# Altium PCB GNSS_MB.PcbDoc
Units mm, origin at the board's own origin, x right, y up, seen from the top; angles counter-clockwise.
Board outline 55 x 55 mm, 4 copper layers (TOP, GND, POWER, BOTTOM), stack 1.586 mm thick; 45 components, 27 nets, 155 pads, 292 vias.
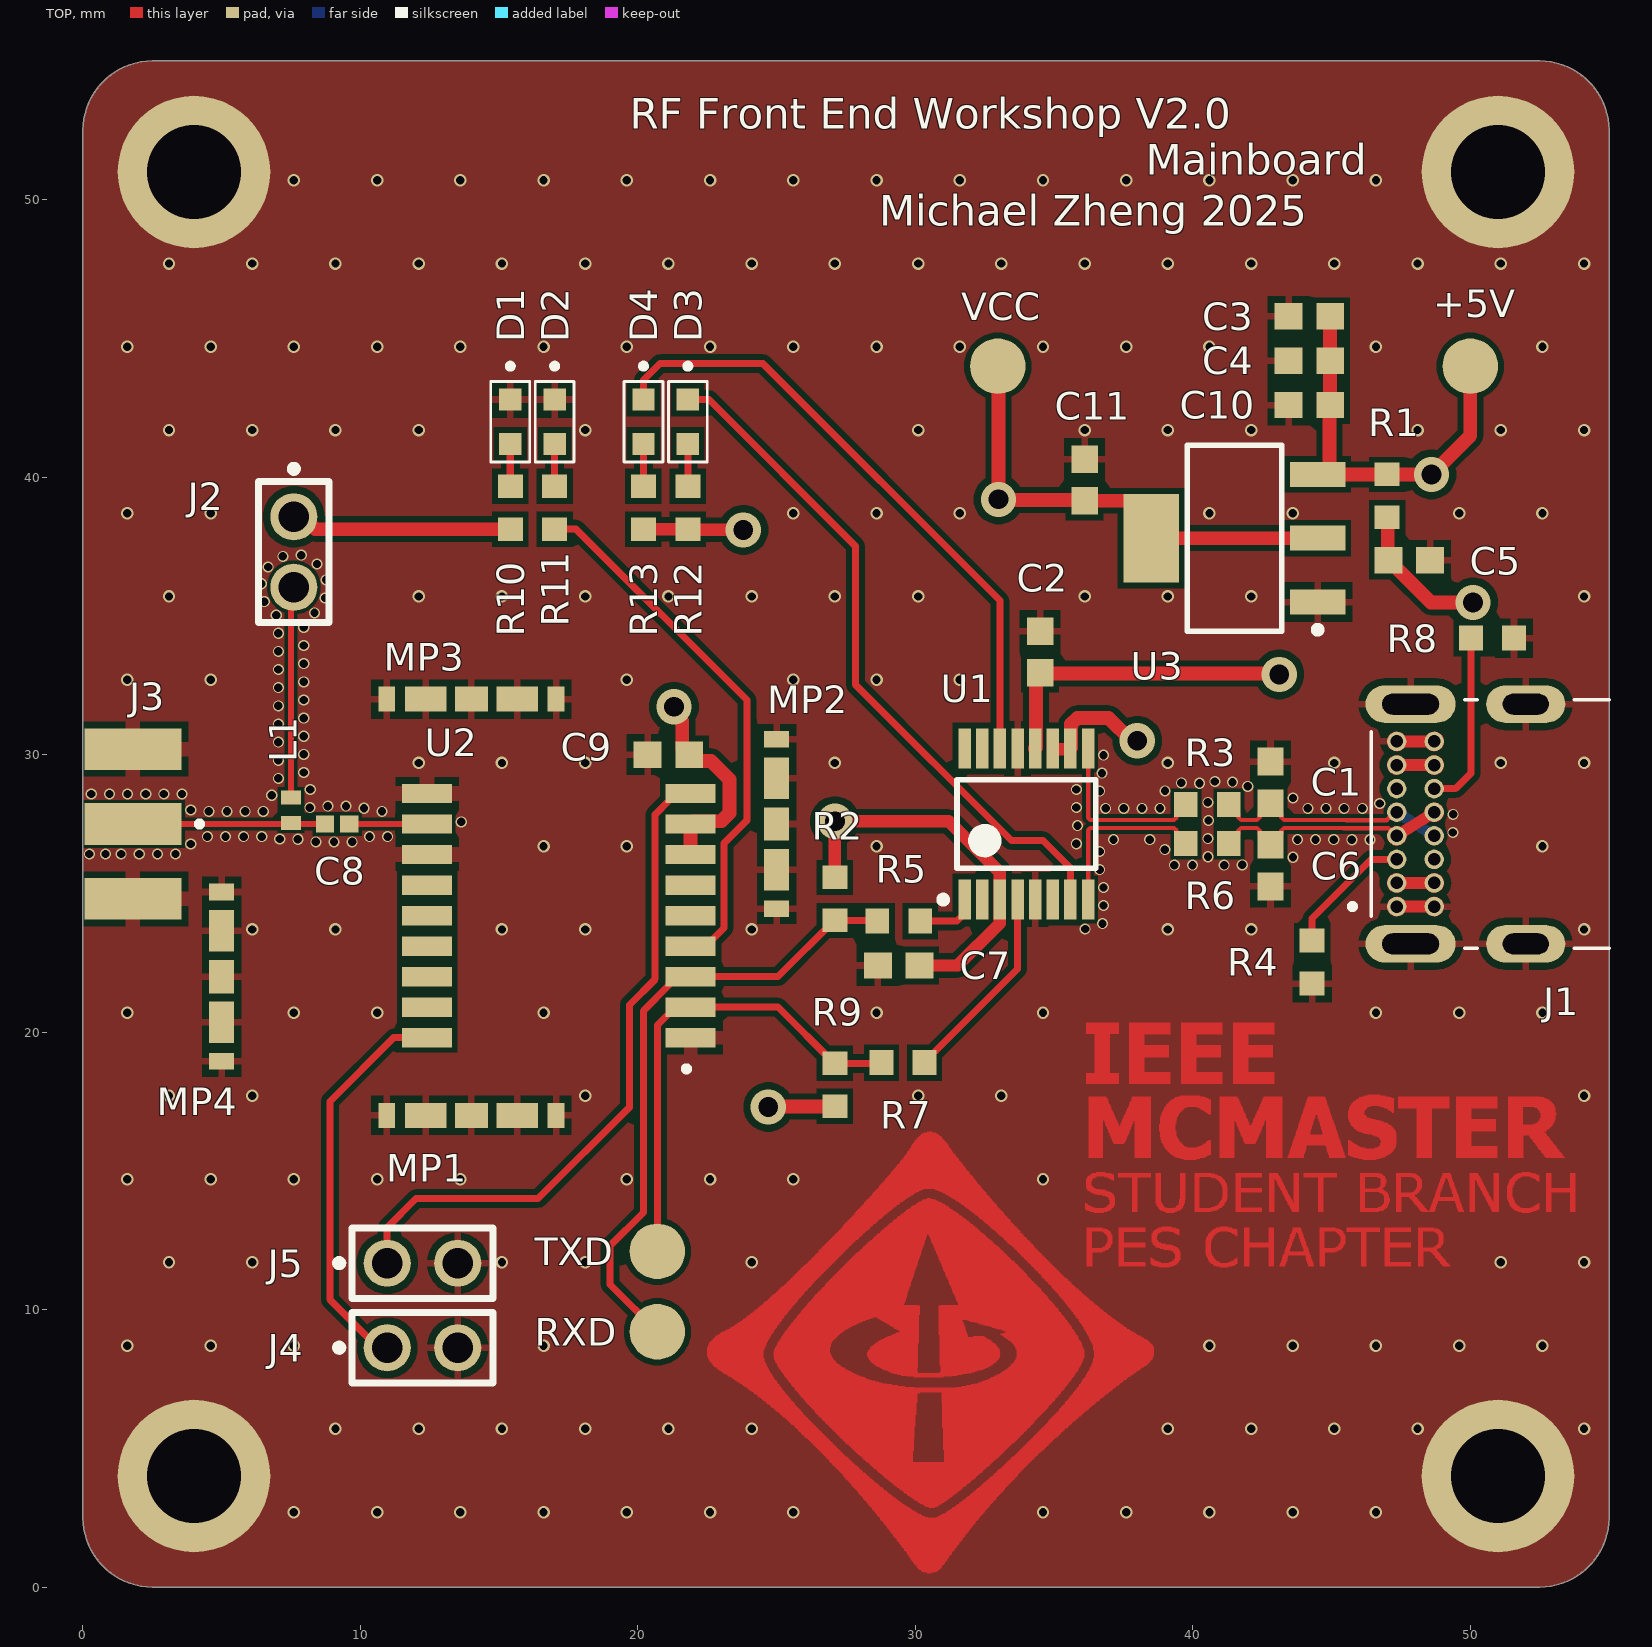
[diagram p0: TOP view]
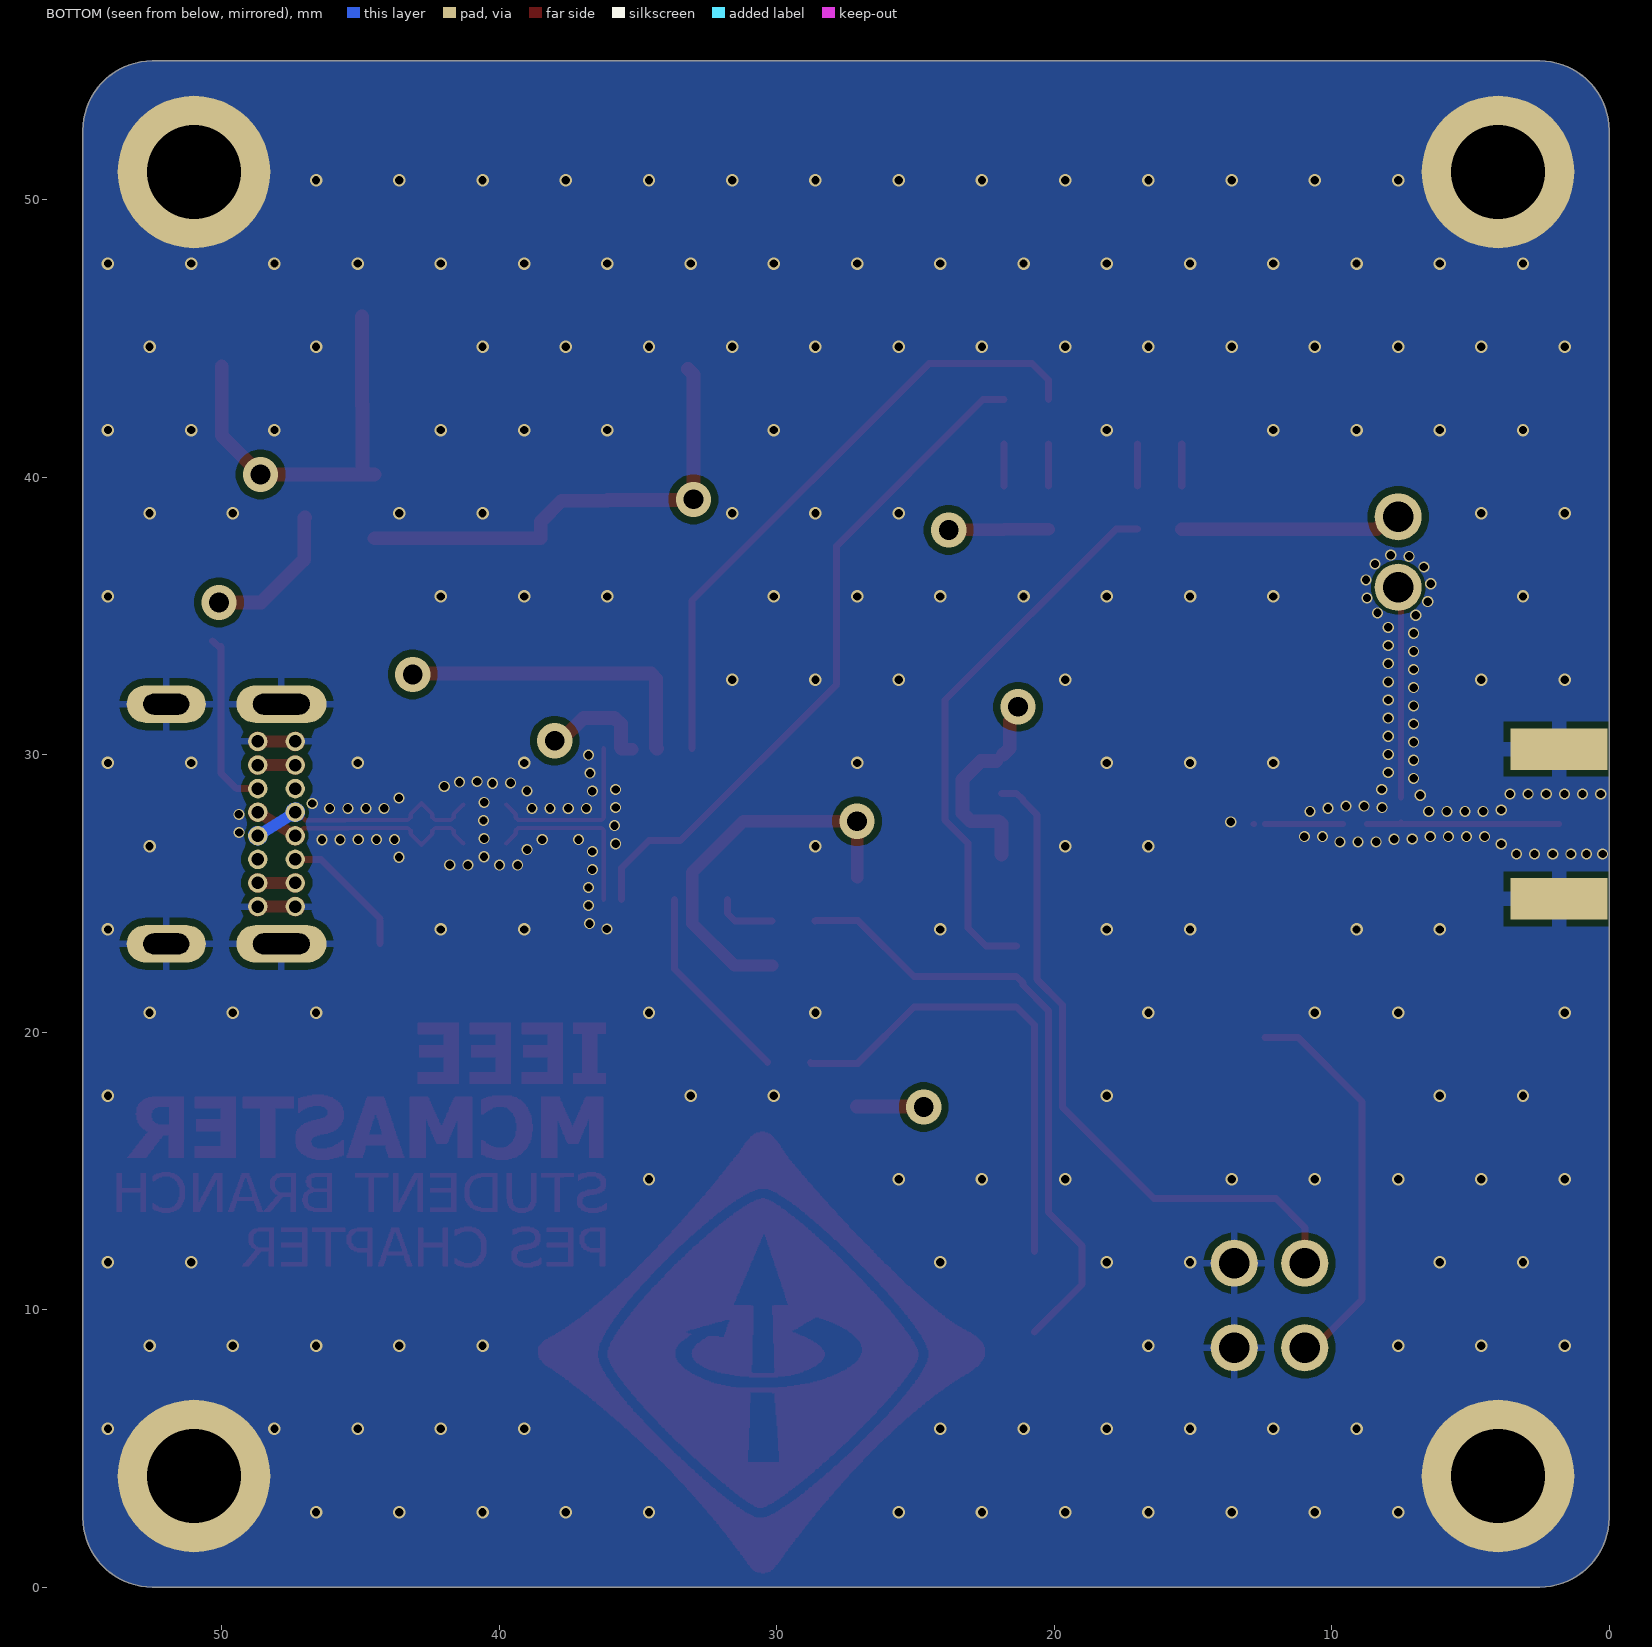
[diagram p1: BOTTOM view, seen from below]
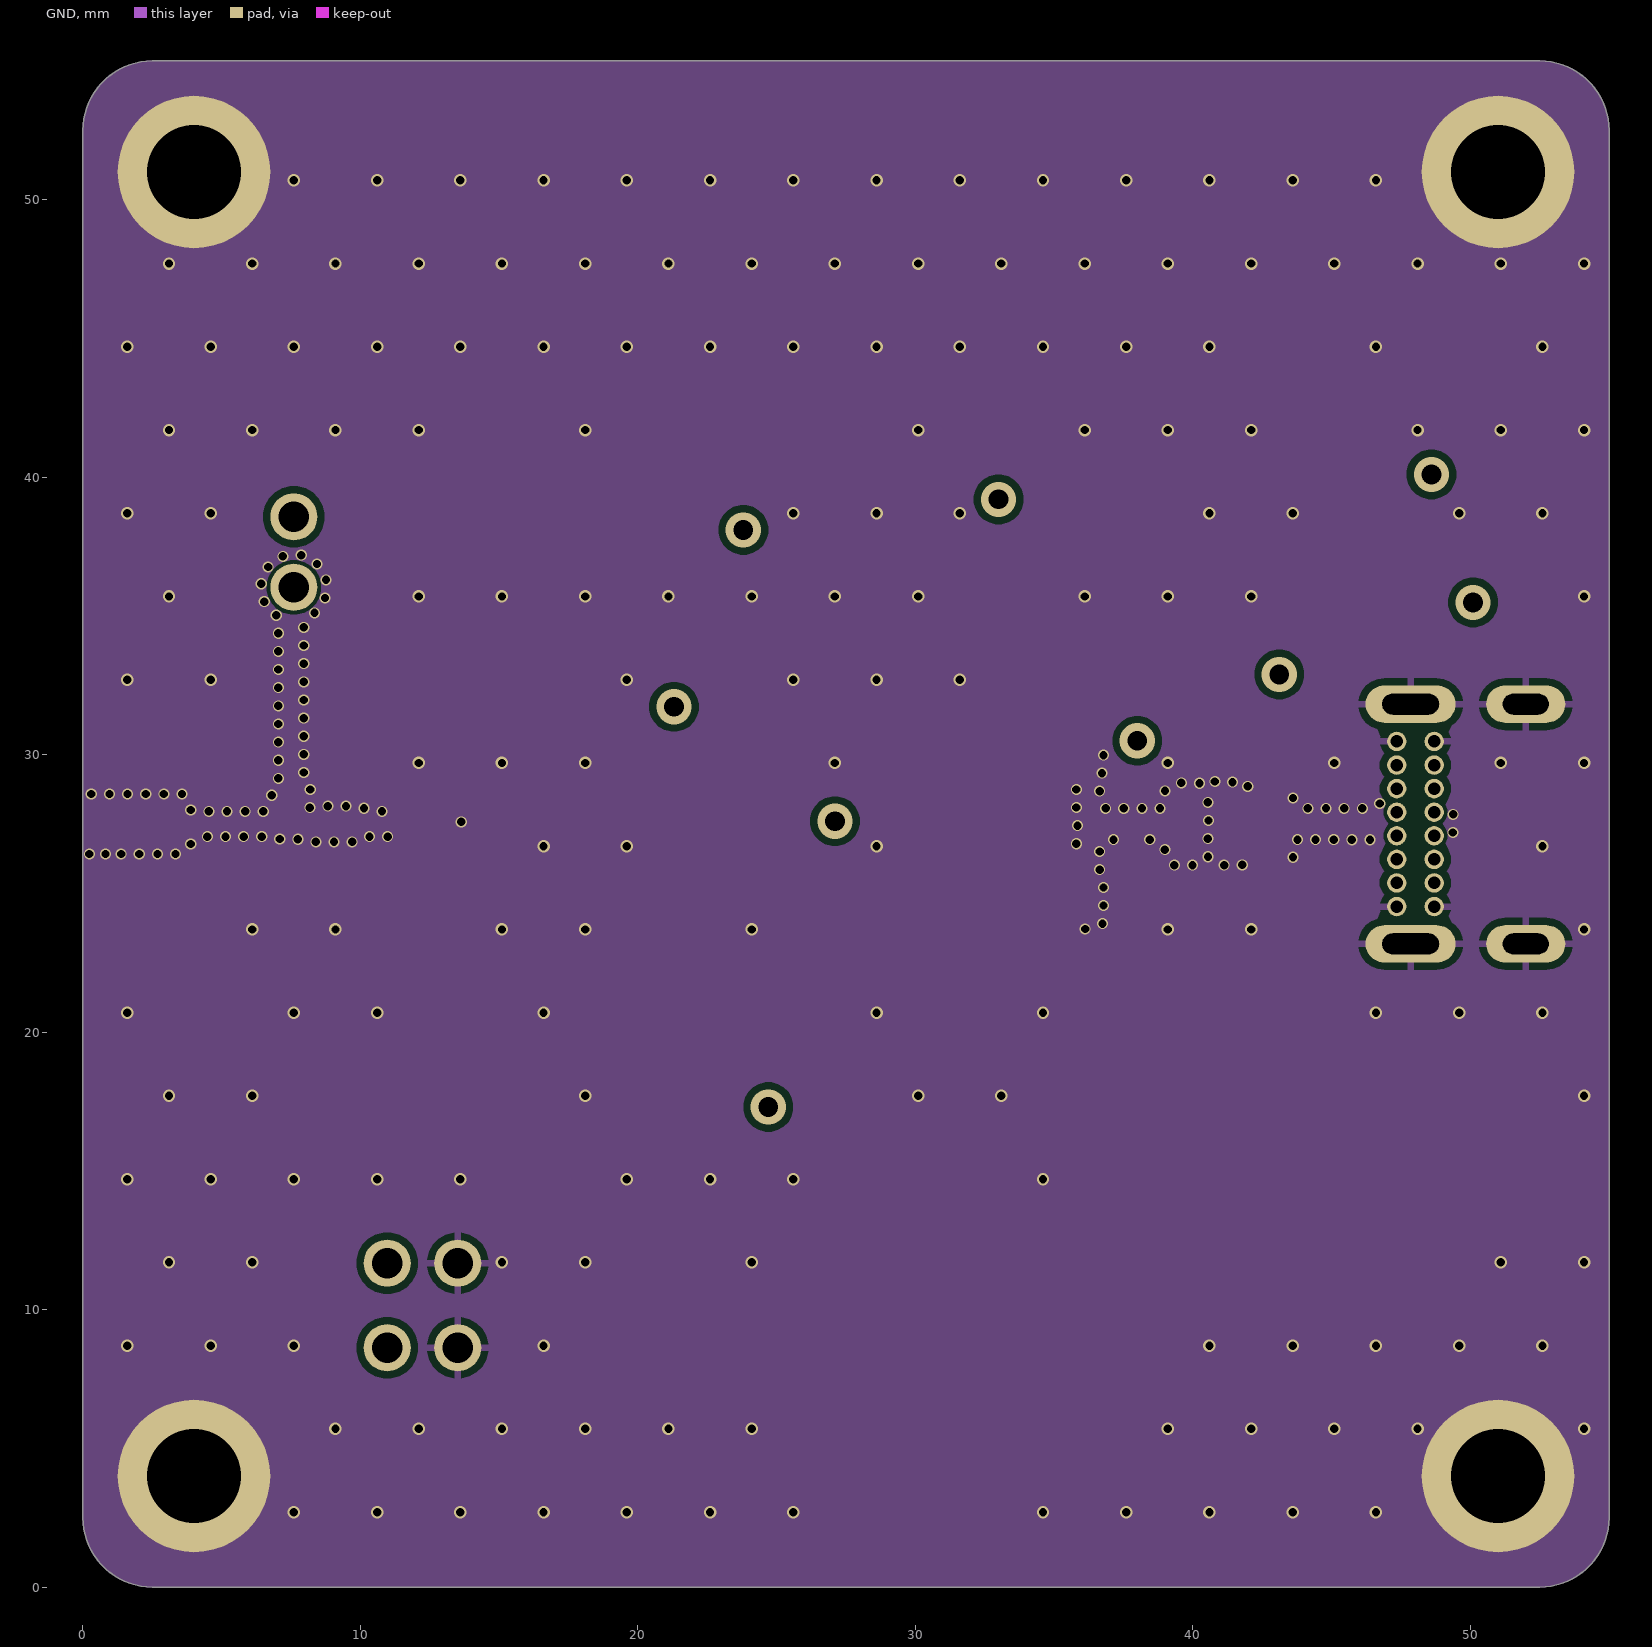
[diagram p2: GND]
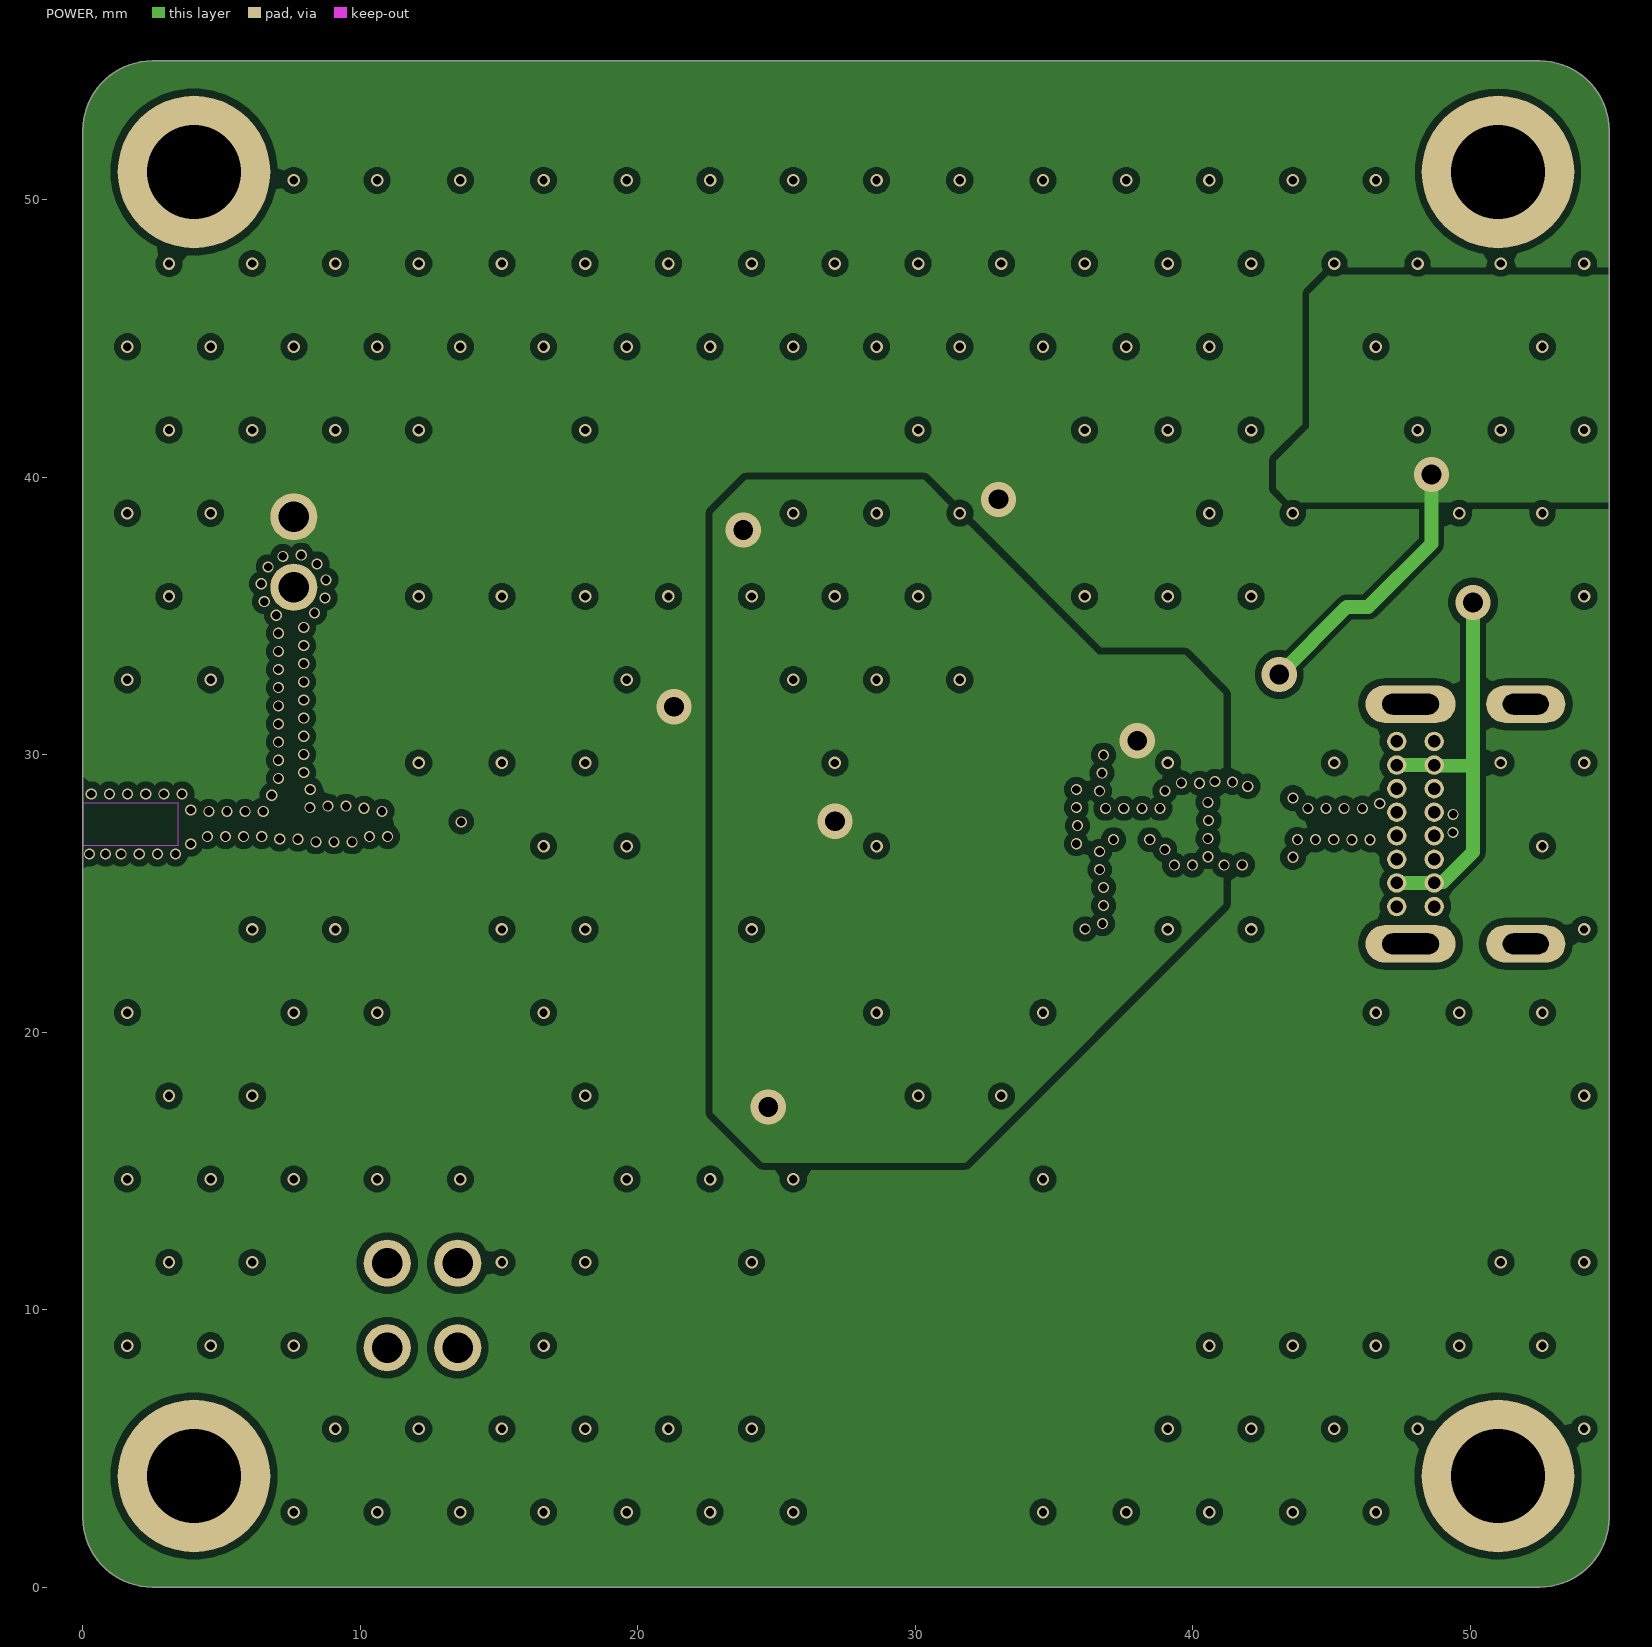
[diagram p3: POWER]
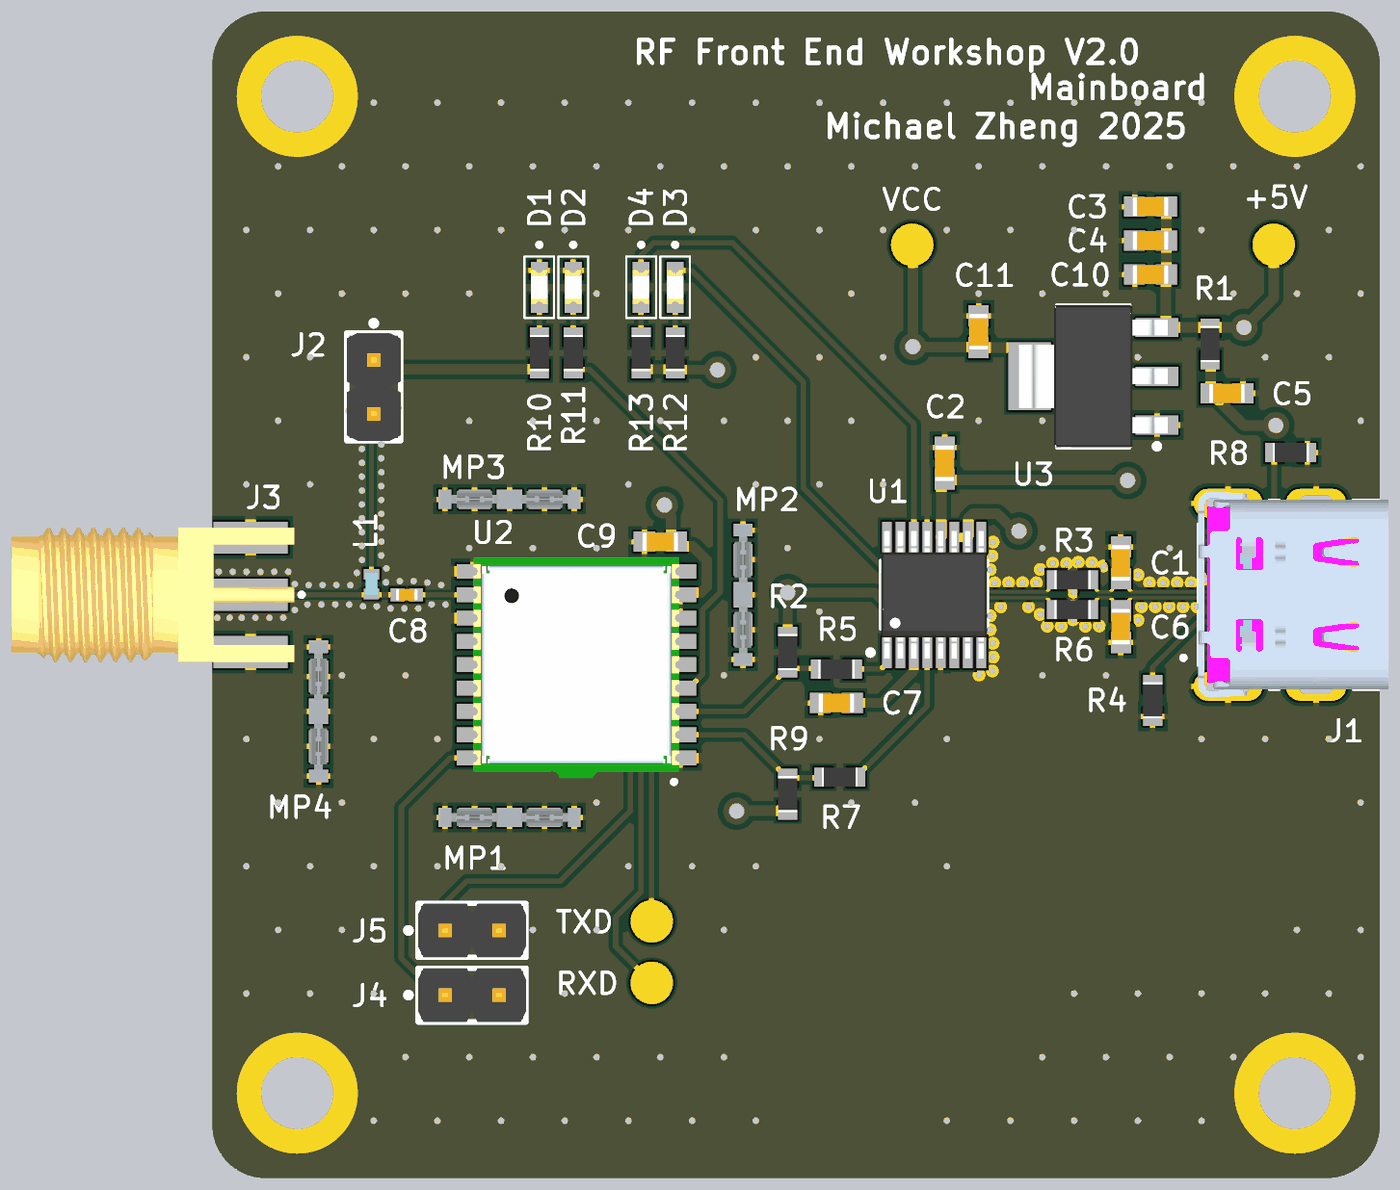
[diagram p4: 3D render of the assembled board from above, using the file's embedded part models]

## Layer stack, top to bottom
Top Solder: solder mask 0.0305, Solder Resist, Dk 3.8
TOP: signal copper 0.035
Dielectric 2: prepreg 0.2104, Core-024, Dk 4.4
GND: signal copper 0.0152
Dielectric 1: core 1.065, Core-024, Dk 4.6
POWER: signal copper 0.0152
Dielectric 3: prepreg 0.2104, Core-024, Dk 4.4
BOTTOM: signal copper 0.035
Bottom Solder: solder mask 0.0305, Solder Resist, Dk 3.8

## Board outline
0,2.5 0,52.5 cw(c2.5,52.5) 2.5,55 52.5,55 cw(c52.5,52.5) 55,52.5 55,2.5 cw(c52.5,2.5) 52.5,0 2.5,0 cw(c2.5,2.5)

## Design rules (kind name [scope] priority, off if disabled: settings)
AssemblyTestpoint [All] p1: testpointundercomponent=TRUE minsize=1.016 maxsize=2.54 preferedsize=1.524 minholesize=0 maxholesize=1.016 preferedholesize=0.813 testpointgrid=0.025 usegrid=TRUE gridoriginx=0 gridoriginy=7.5 gridtolerance=0 allowsidetop=TRUE allowsidebottom=TRUE
Clearance Clearance_3 [InDifferentialPairClass('USB')] p1: gap=0.127 ignorepadtopadclearanceinfootprint=FALSE
Clearance Clearance_2 [InNetClass('RF')] p2: gap=0.127 ignorepadtopadclearanceinfootprint=TRUE
Clearance Clearance_1 [(ExistsOnLayer('GND') Or ExistsOnLayer('POWER')) vs (ExistsOnLayer('GND') Or ExistsOnLayer('POWER'))] p3: gap=0.2 ignorepadtopadclearanceinfootprint=FALSE except(0.1: Arc-SMDPad Track-SMDPad SMDPad-Text; 0.15: SMDPad-SMDPad; 0.25: Arc-Arc Arc-Track Arc-Text Arc-Hole Track-Track Track-Text Track-Hole Text-Text Text-Hole; 0.254: THPad-THPad THPad-Via THPad-Fill THPad-Poly THPad-Region THPad-Hole Via-Via Via-Fill Via-Poly Via-Region Via-Hole Fill-Fill Fill-Poly Fill-Region Fill-Hole Poly-Poly Poly-Region Poly-Hole Region-Region Region-Hole Hole-Hole) sourcerule=47 cellrowname=All cellrowtype=0 cellcolname=All cellcoltype=0 innerlayers=TRUE
Clearance Clearance_2 [(ExistsOnLayer('TOP') Or ExistsOnLayer('BOTTOM')) vs (ExistsOnLayer('TOP') Or ExistsOnLayer('BOTTOM'))] p4: gap=0.2 ignorepadtopadclearanceinfootprint=FALSE except(0.1: Arc-SMDPad Track-SMDPad SMDPad-Text; 0.15: SMDPad-SMDPad; 0.25: Arc-Arc Arc-Track Arc-Text Arc-Hole Track-Track Track-Text Track-Hole Text-Text Text-Hole; 0.254: THPad-THPad THPad-Via THPad-Fill THPad-Poly THPad-Region THPad-Hole Via-Via Via-Fill Via-Poly Via-Region Via-Hole Fill-Fill Fill-Poly Fill-Region Fill-Hole Poly-Poly Poly-Region Poly-Hole Region-Region Region-Hole Hole-Hole) sourcerule=47 cellrowname=All cellrowtype=0 cellcolname=All cellcoltype=0 outerlayers=TRUE
Clearance [All] p5: gap=0.254 ignorepadtopadclearanceinfootprint=FALSE ismatrix=TRUE
DiffPairsRouting DifferentialPairsRouting_1 [InDifferentialPairClass('USB')] p1: maxlimit=0.127 minlimit=0.127 mostfreqgap=0.127 toplayer_minwidth=0.161 toplayer_maxwidth=0.161 toplayer_prefwidth=0.161 midlayer1_minwidth=0.129 midlayer1_maxwidth=0.129 midlayer1_prefwidth=0.129 midlayer2_minwidth=0.129 midlayer2_maxwidth=0.129 midlayer2_prefwidth=0.129 bottomlayer_minwidth=0.161 bottomlayer_maxwidth=0.161 bottomlayer_prefwidth=0.161 impedanceprofiledriven=TRUE impedanceprofileid={C4C9D737-9795-4B09-8F43-2C88F3465287} impedanceprofilevalue=90.000000 maxuncoupledlength=3.5
DiffPairsRouting [All] p2: maxlimit=0.254 minlimit=0.254 mostfreqgap=0.254 toplayer_minwidth=0.381 toplayer_maxwidth=0.381 toplayer_prefwidth=0.381 midlayer1_minwidth=0.381 midlayer1_maxwidth=0.381 midlayer1_prefwidth=0.381 midlayer2_minwidth=0.381 midlayer2_maxwidth=0.381 midlayer2_prefwidth=0.381 bottomlayer_minwidth=0.381 bottomlayer_maxwidth=0.381 bottomlayer_prefwidth=0.381 maxuncoupledlength=12.7
FabricationTestpoint [All] p1: side=3 testpointundercomponent=TRUE minsize=1.016 maxsize=2.54 preferedsize=1.524 minholesize=0 maxholesize=1.016 preferedholesize=0.813 testpointgrid=0.025 allowsidetop=TRUE allowsidebottom=TRUE usegrid=TRUE gridoriginx=0 gridoriginy=7.5 gridtolerance=0
HoleSize [All] p1: absolutevalues=TRUE maxlimit=4 minlimit=0.025 maxpercent=80.000 minpercent=20.000
MinimumSolderMaskSliver [All] p1: minsoldermaskwidth=0.05
PolygonConnect PolygonConnectStyle_6 [InComponent('J3') Or InComponent('U2') vs InNet('GND')] p1: thpad.connectstyle=Relief thpad.reliefconductorwidth=0.508 thpad.reliefentries=2 thpad.polygonreliefangle="45 Angle" thpad.airgapwidth=0.254 thpad.conductorbypadedge=TRUE thpad.mindistance=0.381 thpad.enablemindistance=FALSE smdpad.connectstyle=Relief smdpad.reliefconductorwidth=0.508 smdpad.reliefentries=2 smdpad.polygonreliefangle="45 Angle" smdpad.airgapwidth=0.254 smdpad.conductorbypadedge=TRUE smdpad.mindistance=0.381 smdpad.enablemindistance=FALSE via.connectstyle=Direct via.reliefconductorwidth=0.254 via.reliefentries=2 via.polygonreliefangle="45 Angle" via.airgapwidth=0.254
PolygonConnect PolygonConnectStyle_1 [InNet('+5')] p2: connectstyle=Direct reliefconductorwidth=0.254 reliefentries=4 polygonreliefangle="90 Angle" airgapwidth=0.254
PolygonConnect PolygonConnectStyle_2 [InNet('GND')] p3: thpad.connectstyle=Relief thpad.reliefconductorwidth=0.254 thpad.reliefentries=4 thpad.polygonreliefangle="90 Angle" thpad.airgapwidth=0.254 smdpad.connectstyle=Relief smdpad.reliefconductorwidth=0.254 smdpad.reliefentries=4 smdpad.polygonreliefangle="90 Angle" smdpad.airgapwidth=0.254 via.connectstyle=Direct via.reliefconductorwidth=0.254 via.reliefentries=4 via.polygonreliefangle="90 Angle" via.airgapwidth=0.254
PolygonConnect PolygonConnectStyle_3 [InNet('VCC')] p4: connectstyle=Direct reliefconductorwidth=0.254 reliefentries=4 polygonreliefangle="90 Angle" airgapwidth=0.254
PolygonConnect PolygonConnectStyle_4 [InNet('VCCIO')] p5: connectstyle=Direct reliefconductorwidth=0.254 reliefentries=4 polygonreliefangle="90 Angle" airgapwidth=0.254
PolygonConnect PolygonConnectStyle_5 [InNet('NetC5_1')] p6: connectstyle=Direct reliefconductorwidth=0.254 reliefentries=4 polygonreliefangle="90 Angle" airgapwidth=0.254
PolygonConnect [All] p7: connectstyle=Relief reliefconductorwidth=0.254 reliefentries=4 polygonreliefangle="90 Angle" airgapwidth=0.254
RoutingVias [All] p1: holewidth=0.711 width=1.27 viastyle="Through Hole" minholewidth=0.3 minwidth=0.4 maxholewidth=0.711 maxwidth=1.27
SilkToSolderMaskClearance [IsPad] p1: minsilkscreentomaskgap=0.2 clearancetoexposedcopper=TRUE
SolderMaskExpansion [All] p1: expansion=0.102 istentingtop=FALSE
Width MaxMinWidth_2 [InNet('VCC') Or InNet('+5') Or InNet('VCCIO') Or InNet('NetC5_1')] p1: maxlimit=0.5 minlimit=0.254 preferedwidth=0.5 minimp=50.000000 maximp=50.000000 favimp=50.000000
Width MaxMinWidth_1 [InNetClass('RF')] p2: maxlimit=0.228 minlimit=0.18 preferedwidth=0.228 toplayer_minwidth=0.228 midlayer1_maxwidth=0.18 midlayer1_prefwidth=0.18 midlayer2_maxwidth=0.18 midlayer2_prefwidth=0.18 bottomlayer_minwidth=0.228 impedanceprofiledriven=TRUE impedanceprofileid={1A7CC527-7C1F-469C-AD51-9BAFC7964598} impedanceprofilevalue=50.000000 minimp=50.000000 maximp=50.000000 favimp=50.000000
Width [All] p3: maxlimit=0.254 minlimit=0.254 preferedwidth=0.254
24 further rules are at their usual default settings.

## Classes and differential pairs
differential pair class USB: USBD USBD2
net class RF: NetC8_1 NetJ2_2 RF_IN
differential pair USBD: +USBD_P -USBD_N
differential pair USBD2: +USBD2_P -USBD2_N

## Components (designator, comment, footprint, x,y, rotation, side; value= is the part's Value field where it differs from the comment)
+5V "TEST_POINT" TEST_POINT#1 49.88,45.2 r90 top (schematic designator TP3)
C1 "GCM188L81H104KA57D" CAP_MURATA_0603 42.8,29 r270 top
C2 "GCM188L81H104KA57D" CAP_MURATA_0603 34.5,33.7 r270 top
C3 "GCM188L81H104KA57D" CAP_MURATA_0603 44.2,45.8 r180 top
C4 "GCM188L81H104KA57D" CAP_MURATA_0603 44.2,44.2 r180 top
C5 "GCM188L81H104KA57D" CAP_MURATA_0603 47.8,37 r0 top
C6 "GCM188L81H104KA57D" CAP_MURATA_0603 42.8,26 r270 top
C7 "GCM188L81H104KA57D" CAP_MURATA_0603 29.4,22.4 r180 top
C8 "GRM1555C1H102JA01D" 0402_CAP 9.16,27.5 r0 top
C9 "GCM188L81H104KA57D" CAP_MURATA_0603 21.1,30 r0 top
C10 "GRM188R61A105KA61D" CAP_MURATA_0603 44.2,42.6 r0 top
C11 "GRM188R61A105KA61D" CAP_MURATA_0603 36.1,39.9 r270 top
D1 "Red, 2V, 140°" WL-SMCW 15.4,42 r270 top
D2 "Green, 3.2V, 140°" WL-SMCW 17,42 r270 top
D3 "Green, 3.2V, 140°" WL-SMCW 21.8,42 r270 top
D4 "Red, 2V, 140°" WL-SMCW 20.2,42 r270 top
J1 "GSB1C211110DS1HR" AMPHENOL_GSB1C211110DS1HR 51.4,27.5 r90 top
J2 "61300211121" 61300211121 7.6,37.3 r270 top
J3 "CON-SMA-EDGE-S" RFSOLUTIONS_CON-SMA-EDGE-S 1.8,27.5 r0 top
J4 "61300211121" 61300211121 12.234,8.625 r0 top
J5 "61300211121" 61300211121 12.234,11.673 r0 top
L1 "LQW15AN3N6C10D" INDC1006X60N 7.5,28 r90 top value=20nH
MP1 "36900000" 36900000 14,17 r180 top
MP2 "36900000" 36900000 25,27.5 r90 top
MP3 "36900000" 36900000 14,32 r180 top
MP4 "36900000" 36900000 5,22 r90 top
R1 "RC0603JR-070RL" RC0603JR-070RL 47,39.325 r270 top
R2 "RC0603JR-070RL" RC0603JR-070RL 27.1,24.8 r90 top
R3 "RC0603JR-070RL" RC0603JR-070RL 40.525,28.2 r0 top
R4 "RC0603JR-070RL" RC0603JR-070RL 44.3,22.525 r90 top
R5 "RC0603JR-070RL" RC0603JR-070RL 29.4,24 r0 top
R6 "RC0603JR-070RL" RC0603JR-070RL 40.525,26.8 r0 top
R7 "RC0603JR-070RL" RC0603JR-070RL 29.554,18.9 r0 top
R8 "RC0603JR-070RL" RC0603JR-070RL 50.8,34.2 r180 top
R9 "RC0603JR-070RL" RC0603JR-070RL 27.1,18.1 r270 top
R10 "RC0603JR-070RL" RC0603JR-070RL 15.4,38.9 r270 top
R11 "RC0603JR-070RL" RC0603JR-070RL 17,38.9 r270 top
R12 "RC0603JR-070RL" RC0603JR-070RL 21.8,38.9 r270 top
R13 "RC0603JR-070RL" RC0603JR-070RL 20.2,38.9 r270 top
RXD "TEST_POINT" TEST_POINT#2 18.8,8.8 r0 top (schematic designator TP1)
TXD "TEST_POINT" TEST_POINT#3 20.032,11.931 r0 top (schematic designator TP2)
U1 "FT230XS-R" FT230XS-R 34,27.5 r90 top
U2 "MAX-M10M" MAX-M10M 12.4,28.6 r0 top
U3 "TLV1117LV33DCYR" TLV1117LV33DCYR 41.5,37.8 r180 top
VCC "TEST_POINT" TEST_POINT#4 33.3,44.2 r0 top (schematic designator TP4)

## Footprints (in the part's own frame and the unit in brackets; to place one, negate y for a bottom-side part, rotate by r counter-clockwise, add the part's x,y. Pads: shape width x height; smd on the part's side, far side on the other; paste and mask are expansions set on the pad)
0402_CAP [mm]
  rect 0.66x0.62 smd: 1(-0.44,0) 2(0.44,0)
  body extent -0.53,-0.28 0.53,0.28, height 0.55
36900000 [mm] "Shielding Cabinet Clip"
  rect 0.6x0.9 smd: 1(-3.05,0) 1(3.05,0)
  rect 1.5x0.9 smd: 1(-1.65,0) 1(1.65,0)
  rect 1.2x0.9 smd: 1(0,0)
  body extent -3.25,-0.41 3.25,0.41, height 1.28
61300211121 [mm]
  round 1.7 hole 1.1: 1(-1.27,0) 2(1.27,0)
  silkscreen extent -3.13,-1.27 2.54,1.27, body extent -2.54,-1.27 2.54,1.27, height 8.54
AMPHENOL_GSB1C211110DS1HR [mm]
  round 0.7 hole 0.45 mask+0.05: A1(-2.975,4.05) A4(-2.125,4.05) A5(-1.275,4.05) A6(-0.425,4.05) A7(0.425,4.05) A8(1.275,4.05) A9(2.125,4.05) A12(2.975,4.05) B1(2.975,2.7) B4(2.125,2.7) B5(1.275,2.7) B6(0.425,2.7) B7(-0.425,2.7) B8(-1.275,2.7) B9(-2.125,2.7) B12(-2.975,2.7)
  oval 1.35x3.25 hole 0.75 slot 2.05 at 90 deg: SH1(-4.32,3.55) SH2(4.32,3.55)
  oval 1.35x2.85 hole 0.75 slot 1.65 at 90 deg: SH3(-4.32,-0.6) SH4(4.32,-0.6)
  TOP region: -2.916,4.395 -2.859,4.38 -2.805,4.356 -2.756,4.323 -2.714,4.283 -2.678,4.235 -2.651,4.183 -2.634,4.127 -2.625,4.068 -2.627,4.009 -2.639,3.952 -2.66,3.897 -2.691,3.846 -2.729,3.801 -2.775,3.763 -2.775,2.987 -2.729,2.949 -2.691,2.904 -2.66,2.853 -2.639,2.798 -2.627,2.741 -2.625,2.682 -2.634,2.623 -2.651,2.567 -2.678,2.515 -2.714,2.467 -2.756,2.427 -2.805,2.394 -2.859,2.37 -2.916,2.355 -2.975,2.35 -3.034,2.355 -3.091,2.37 -3.145,2.394 -3.194,2.427 -3.236,2.467 -3.272,2.515 -3.299,2.567 -3.316,2.623 -3.325,2.682 -3.323,2.741 -3.311,2.798 -3.29,2.853 -3.259,2.904 -3.221,2.949 -3.175,2.987 -3.175,3.763 -3.175,3.763 -3.221,3.801 -3.259,3.846 -3.29,3.897 -3.311,3.952 -3.323,4.009 -3.325,4.068 -3.316,4.127 -3.299,4.183 -3.272,4.235 -3.236,4.283 -3.194,4.323 -3.145,4.356 -3.091,4.38 -3.034,4.395 -2.975,4.4
  TOP region: -2.066,4.395 -2.009,4.38 -1.955,4.356 -1.906,4.323 -1.864,4.283 -1.828,4.235 -1.801,4.183 -1.784,4.127 -1.775,4.068 -1.777,4.009 -1.789,3.952 -1.81,3.897 -1.841,3.846 -1.879,3.801 -1.925,3.763 -1.925,2.987 -1.879,2.949 -1.841,2.904 -1.81,2.853 -1.789,2.798 -1.777,2.741 -1.775,2.682 -1.784,2.623 -1.801,2.567 -1.828,2.515 -1.864,2.467 -1.906,2.427 -1.955,2.394 -2.009,2.37 -2.066,2.355 -2.125,2.35 -2.184,2.355 -2.241,2.37 -2.295,2.394 -2.344,2.427 -2.386,2.467 -2.422,2.515 -2.449,2.567 -2.466,2.623 -2.475,2.682 -2.473,2.741 -2.461,2.798 -2.44,2.853 -2.409,2.904 -2.371,2.949 -2.325,2.987 -2.325,3.763 -2.371,3.801 -2.409,3.846 -2.44,3.897 -2.461,3.952 -2.473,4.009 -2.475,4.068 -2.466,4.127 -2.449,4.183 -2.422,4.235 -2.386,4.283 -2.344,4.323 -2.295,4.356 -2.241,4.38 -2.184,4.395 -2.125,4.4
  TOP region: 2.184,4.395 2.241,4.38 2.295,4.356 2.344,4.323 2.386,4.283 2.422,4.235 2.449,4.183 2.466,4.127 2.475,4.068 2.473,4.009 2.461,3.952 2.44,3.897 2.409,3.846 2.371,3.801 2.325,3.763 2.325,2.987 2.371,2.949 2.409,2.904 2.44,2.853 2.461,2.798 2.473,2.741 2.475,2.682 2.466,2.623 2.449,2.567 2.422,2.515 2.386,2.467 2.344,2.427 2.295,2.394 2.241,2.37 2.184,2.355 2.125,2.35 2.066,2.355 2.009,2.37 1.955,2.394 1.906,2.427 1.864,2.467 1.828,2.515 1.801,2.567 1.784,2.623 1.775,2.682 1.777,2.741 1.789,2.798 1.81,2.853 1.841,2.904 1.879,2.949 1.925,2.987 1.925,3.763 1.879,3.801 1.841,3.846 1.81,3.897 1.789,3.952 1.777,4.009 1.775,4.068 1.784,4.127 1.801,4.183 1.828,4.235 1.864,4.283 1.906,4.323 1.955,4.356 2.009,4.38 2.066,4.395 2.125,4.4
  TOP region: 3.034,4.395 3.091,4.38 3.145,4.356 3.194,4.323 3.236,4.283 3.272,4.235 3.299,4.183 3.316,4.127 3.325,4.068 3.323,4.009 3.311,3.952 3.29,3.897 3.259,3.846 3.221,3.801 3.175,3.763 3.175,2.987 3.221,2.949 3.259,2.904 3.29,2.853 3.311,2.798 3.323,2.741 3.325,2.682 3.316,2.623 3.299,2.567 3.272,2.515 3.236,2.467 3.194,2.427 3.145,2.394 3.091,2.37 3.034,2.355 2.975,2.35 2.916,2.355 2.859,2.37 2.805,2.394 2.756,2.427 2.714,2.467 2.678,2.515 2.651,2.567 2.634,2.623 2.625,2.682 2.627,2.741 2.639,2.798 2.66,2.853 2.691,2.904 2.729,2.949 2.775,2.987 2.775,3.763 2.729,3.801 2.691,3.846 2.66,3.897 2.639,3.952 2.627,4.009 2.625,4.068 2.634,4.127 2.651,4.183 2.678,4.235 2.714,4.283 2.756,4.323 2.805,4.356 2.859,4.38 2.916,4.395 2.975,4.4
  TOP region: -0.387,4.398 -0.329,4.386 -0.273,4.365 -0.222,4.335 -0.177,4.297 -0.139,4.252 -0.109,4.201 -0.088,4.145 -0.077,4.087 -0.076,4.028 -0.084,3.969 -0.102,3.915 0.447,3.05 0.502,3.042 0.559,3.024 0.612,2.997 0.659,2.961 0.7,2.918 0.732,2.869 0.756,2.815 0.771,2.758 0.776,2.699 0.77,2.64 0.755,2.582 0.731,2.528 0.697,2.479 0.656,2.437 0.608,2.402 0.556,2.375 0.499,2.358 0.44,2.35 0.381,2.353 0.323,2.365 0.268,2.387 0.218,2.418 0.173,2.457 0.136,2.503 0.107,2.555 0.087,2.611 0.077,2.669 0.076,2.728 0.086,2.787 0.105,2.841 0.105,2.842 -0.44,3.7 -0.496,3.707 -0.553,3.724 -0.606,3.75 -0.654,3.785 -0.695,3.827 -0.729,3.876 -0.754,3.929 -0.77,3.987 -0.775,4.046 -0.771,4.105 -0.757,4.162 -0.733,4.216 -0.701,4.266 -0.66,4.309 -0.613,4.345 -0.561,4.373 -0.505,4.391 -0.446,4.399
  BOTTOM region: 0.505,4.391 0.561,4.373 0.613,4.345 0.66,4.309 0.701,4.266 0.733,4.216 0.757,4.162 0.771,4.105 0.775,4.046 0.77,3.987 0.754,3.929 0.729,3.876 0.695,3.827 0.654,3.785 0.606,3.75 0.553,3.724 0.496,3.707 0.44,3.7 -0.105,2.842 -0.105,2.841 -0.086,2.787 -0.076,2.728 -0.077,2.669 -0.087,2.611 -0.107,2.555 -0.136,2.503 -0.173,2.457 -0.218,2.418 -0.268,2.387 -0.323,2.365 -0.381,2.353 -0.44,2.35 -0.499,2.358 -0.556,2.375 -0.608,2.402 -0.656,2.437 -0.697,2.479 -0.731,2.528 -0.755,2.582 -0.77,2.64 -0.776,2.699 -0.771,2.758 -0.756,2.815 -0.732,2.869 -0.7,2.918 -0.659,2.961 -0.612,2.997 -0.559,3.024 -0.502,3.042 -0.447,3.05 0.102,3.915 0.084,3.969 0.076,4.028 0.077,4.087 0.088,4.145 0.109,4.201 0.139,4.252 0.177,4.297 0.222,4.335 0.273,4.365 0.329,4.386 0.387,4.398 0.446,4.399
  silkscreen extent -4.47,-3.6 4.47,5.75, body extent -4.84,-4.01 4.86,4.96, height 3.37
CAP_MURATA_0603 [mm]
  rect 1x0.95 smd: 1(-0.75,0) 2(0.75,0)
  body extent -0.85,-0.45 0.85,0.45, height 0.9
FT230XS-R [mm] "SOP, 16-Leads, Body 4.90x3.90mm, Pitch 0.64mm, IPC Medium Density"
  rect 1.45x0.45 smd: 1(-2.725,2.222) 2(-2.725,1.587) 3(-2.725,0.952) 4(-2.725,0.317) 5(-2.725,-0.318) 6(-2.725,-0.953) 7(-2.725,-1.588) 8(-2.725,-2.222) 9(2.725,-2.222) 10(2.725,-1.587) 11(2.725,-0.952) 12(2.725,-0.317) 13(2.725,0.318) 14(2.725,0.953) 15(2.725,1.588) 16(2.725,2.222)
  silkscreen extent -2.85,-2.5 1.6,3.12, body extent -3,-2.5 3,2.5, height 1.75
INDC1006X60N [mm]
  rect 0.51x0.73 smd: 1(-0.46,0) 2(0.46,0)
  body extent -0.5,-0.3 0.5,0.3, height 0.6
MAX-M10M [mm]
  rect 1.8x0.7 smd: 1(9.5,-8.8) 2(9.5,-7.7) 3(9.5,-6.6) 4(9.5,-5.5) 5(9.5,-4.4) 6(9.5,-3.3) 7(9.5,-2.2) 8(9.5,-1.1) 9(9.5,0) 10(0,0) 11(0,-1.1) 12(0,-2.2) 13(0,-3.3) 14(0,-4.4) 15(0,-5.5) 16(0,-6.6) 17(0,-7.7) 18(0,-8.8)
  silkscreen extent 9.25,-10.02 9.45,-9.83, body extent -0.1,-9.75 9.6,0.65, height 2.7
RC0603JR-070RL [mm] "Chip Resistor, 2-Leads, Body 1.60x0.80mm, IPC Medium Density"
  rect 0.85x0.9 smd: 1(-0.775,0) 2(0.775,0)
  body extent -0.85,-0.45 0.85,0.45, height 0.55
RFSOLUTIONS_CON-SMA-EDGE-S [mm]
  rect 3.5x1.5 smd: 1(0,0) 2(0,-2.7) 2(0,2.7)
  rect 3.5x1.5 smd far side: 2(0,-2.7) 2(0,2.7)
  silkscreen extent 2.3,-0.1 2.5,0.1, body extent -11.27,-3.17 2.06,3.17, height 3.55
TEST_POINT#1 [mm]
  round 2 smd paste-2539.97: 1(-1.2,-0.12)
TEST_POINT#2 [mm]
  round 2 smd paste-2539.97: 1(1.9,0.4)
TEST_POINT#3 [mm]
  round 2 smd paste-2539.97: 1(0.668,0.169)
TEST_POINT#4 [mm]
  round 2 smd paste-2539.97: 1(-0.33,-0.2)
TLV1117LV33DCYR [mm] "SOT223, 4-Leads, Body 6.50x7.00mm (avg), Pitch 2.30mm, IPC Medium Density"
  rect 2x0.9 smd: 1(-3,2.3) 2(-3,0) 3(-3,-2.3)
  rect 2x3.2 smd: 4(3,0)
  silkscreen extent -3.13,-3.35 1.7,3.42, body extent -3.5,-3.35 3.5,3.35, height 1.8
WL-SMCW [mm]
  rect 0.8x0.8 smd: 1(-0.8,0) 2(0.8,0)
  silkscreen extent -2.07,-0.7 1.45,0.7, body extent -0.8,-0.4 0.8,0.4, height 0.7

## Part data
+5V RXD TXD VCC: "TEST POINT 2MM"
C1 C4 C6: "CAP CER 0.1UF 50V X8L 0603", Capacitance=47pF
C2 C3 C7 C9: "CAP CER 0.1UF 50V X8L 0603", Capacitance=0.1uF
C5: "CAP CER 0.1UF 50V X8L 0603", Capacitance=10nF
C8: "CAP CER 1000PF 50V C0G/NP0 0402", Capacitance=8.1pF
C10 C11: "CAP CER 1UF 10V X5R 0603", Capacitance=1uF
D1 D4: library part 150060RS75000, "WL-SMCW Mono-color Chip LED Waterclear, SMT, size 0603, Red, 2V, 140°", Case/Size Code=0603, Emitting Color=Red, Forward Voltage=2V, Manufacturer="Wurth Elektronik", Operating Temperature Max=85°C, Operating Temperature Min=-40°C, Category="Signal LEDs", Chip Technology=AlInGaP, ComponentLink1Description="Website Link", ComponentLink1URL=https://www.we-online.com/redexpert/article/150060RS75000?ad, ComponentLink2Description="Datasheet Link", ComponentLink2URL=https://www.we-online.com/redexpert/spec/150060RS75000?ad, Dominant Wavelength=625nm, Height=0.7mm, Length=1.6mm, Luminous Intensity=250mcd, Manufacturer Part Number=150060RS75000, Match Code=WL-SMCW, Mount="Surface Mount", Packaging="Tape and Reel", Peak Wavelength=630nm, Viewing Angle=140°, Width=0.8mm
D2 D3: library part 150060GS75000, "WL-SMCW Mono-color Chip LED Waterclear, SMT, size 0603, Green, 3.2V, 140°", Case/Size Code=0603, Emitting Color=Green, Forward Voltage=3.2V, Manufacturer="Wurth Elektronik", Operating Temperature Max=85°C, Operating Temperature Min=-40°C, Category="Signal LEDs", Chip Technology=InGaN, ComponentLink1Description="Website Link", ComponentLink1URL=https://www.we-online.com/redexpert/article/150060GS75000?ad, ComponentLink2Description="Datasheet Link", ComponentLink2URL=https://www.we-online.com/redexpert/spec/150060GS75000?ad, Dominant Wavelength=525nm, Height=0.7mm, Length=1.6mm, Luminous Intensity=430mcd, Manufacturer Part Number=150060GS75000, Match Code=WL-SMCW, Mount="Surface Mount", Packaging="Tape and Reel", Peak Wavelength=515nm, Viewing Angle=140°, Width=0.8mm
J1: "USB2.0, Type C, Top mount, Center Height 1.78mm, Dual Row DIP", Package=None, Check_prices=https://www.snapeda.com/parts/GSB1C211110DS1HR/Amphenol/view-part/?ref=eda, MF="Amphenol Canada", MP=GSB1C211110DS1HR, SnapEDA_Link=https://www.snapeda.com/parts/GSB1C211110DS1HR/Amphenol/view-part/?ref=snap
J2 J4 J5: "CONN HEADER VERT 2POS 2.54MM"
J3: "CONN SMA JACK STR EDGE MNT"
L1: "FIXED IND 3.6NH 900MA 40 MOHM", Package=None, Availability=Unavailable, MP=LQW15AN3N6C10D, Price=None
MP1 MP2 MP3 MP4: "WE-SHC Shielding Cabinet, Clip, Tin Plated, Tape and Reel, 6.5x0.8x1.27mm", Manufacturer="Wurth Elektronik", Operating Temperature Max=125°C, Operating Temperature Min=-40°C, Base Material=Steel, Category="EMC Shielding", ComponentLink1Description="Website Link", ComponentLink1URL=https://www.we-online.com/redexpert/article/36900000?ad, ComponentLink2Description="Datasheet Link", ComponentLink2URL=https://www.we-online.com/redexpert/spec/36900000?ad, Height=1.27mm, Length=6.5mm, Manufacturer Part Number=36900000, Match Code=WE-SHC, Mount="Surface Mount", Packaging="Tape and Reel", Plating="Tin Plated", Type=Clip, Width=0.8mm
R1 R5 R7: "Chip Resistor, 0 Ohm, +/- 5%, 0.1 W, -55 to 155 degC, 0603 (1608 Metric), RoHS, Tape and Reel", Case Code (Imperial)=0603, Case Code (Metric)=1608, Manufacturer=Yageo, Max Operating Temperature=155degC, Min Operating Temperature=-55degC, Package Description="2-Pin Surface Mount Device, Body 1.6 x 0.8 mm", Package Quantity=5000, Power Rating=100mW, Resistance=0Ω, Temperature Coefficient=200ppm/degreesC, Tolerance=5%, Voltage Rating=50V, Case/Package=0603, Composition=ThickFilm, Contact Plating=Tin, Datasheet URL=http://www.yageo.com/NewPortal/yageodocoutput?fileName=/pdf/R-Chip/PYu-RC_Group_51_RoHS_L_5.pdf, Datasheet Version="Rev. 5, 10/2016", Depth=0.8mm, Height=0.45mm, Lead Free=LeadFree, Length=1.6mm, Manufacturer URL=http://www.yageo.com/, Military Standard=Not, Number of Pins=2, Package Reference=0603, Packaging=TapeandReel, Radiation Hardening=No, REACH SVHC=NoSVHC, RoHSCompliant=true, Termination=SMD/SMT, Voltage Rating (DC)=50V, Width=0.8mm
R2 R9: "Chip Resistor, 0 Ohm, +/- 5%, 0.1 W, -55 to 155 degC, 0603 (1608 Metric), RoHS, Tape and Reel", Case Code (Imperial)=0603, Case Code (Metric)=1608, Manufacturer=Yageo, Max Operating Temperature=155degC, Min Operating Temperature=-55degC, Package Description="2-Pin Surface Mount Device, Body 1.6 x 0.8 mm", Package Quantity=5000, Power Rating=100mW, Resistance=10kΩ, Temperature Coefficient=200ppm/degreesC, Tolerance=5%, Voltage Rating=50V, Case/Package=0603, Composition=ThickFilm, Contact Plating=Tin, Datasheet URL=http://www.yageo.com/NewPortal/yageodocoutput?fileName=/pdf/R-Chip/PYu-RC_Group_51_RoHS_L_5.pdf, Datasheet Version="Rev. 5, 10/2016", Depth=0.8mm, Height=0.45mm, Lead Free=LeadFree, Length=1.6mm, Manufacturer URL=http://www.yageo.com/, Military Standard=Not, Number of Pins=2, Package Reference=0603, Packaging=TapeandReel, Radiation Hardening=No, REACH SVHC=NoSVHC, RoHSCompliant=true, Termination=SMD/SMT, Voltage Rating (DC)=50V, Width=0.8mm
R3 R6: "Chip Resistor, 0 Ohm, +/- 5%, 0.1 W, -55 to 155 degC, 0603 (1608 Metric), RoHS, Tape and Reel", Case Code (Imperial)=0603, Case Code (Metric)=1608, Manufacturer=Yageo, Max Operating Temperature=155degC, Min Operating Temperature=-55degC, Package Description="2-Pin Surface Mount Device, Body 1.6 x 0.8 mm", Package Quantity=5000, Power Rating=100mW, Resistance=27Ω, Temperature Coefficient=200ppm/degreesC, Tolerance=5%, Voltage Rating=50V, Case/Package=0603, Composition=ThickFilm, Contact Plating=Tin, Datasheet URL=http://www.yageo.com/NewPortal/yageodocoutput?fileName=/pdf/R-Chip/PYu-RC_Group_51_RoHS_L_5.pdf, Datasheet Version="Rev. 5, 10/2016", Depth=0.8mm, Height=0.45mm, Lead Free=LeadFree, Length=1.6mm, Manufacturer URL=http://www.yageo.com/, Military Standard=Not, Number of Pins=2, Package Reference=0603, Packaging=TapeandReel, Radiation Hardening=No, REACH SVHC=NoSVHC, RoHSCompliant=true, Termination=SMD/SMT, Voltage Rating (DC)=50V, Width=0.8mm
R4 R8: "Chip Resistor, 0 Ohm, +/- 5%, 0.1 W, -55 to 155 degC, 0603 (1608 Metric), RoHS, Tape and Reel", Case Code (Imperial)=0603, Case Code (Metric)=1608, Manufacturer=Yageo, Max Operating Temperature=155degC, Min Operating Temperature=-55degC, Package Description="2-Pin Surface Mount Device, Body 1.6 x 0.8 mm", Package Quantity=5000, Power Rating=100mW, Resistance=5k1Ω, Temperature Coefficient=200ppm/degreesC, Tolerance=5%, Voltage Rating=50V, Case/Package=0603, Composition=ThickFilm, Contact Plating=Tin, Datasheet URL=http://www.yageo.com/NewPortal/yageodocoutput?fileName=/pdf/R-Chip/PYu-RC_Group_51_RoHS_L_5.pdf, Datasheet Version="Rev. 5, 10/2016", Depth=0.8mm, Height=0.45mm, Lead Free=LeadFree, Length=1.6mm, Manufacturer URL=http://www.yageo.com/, Military Standard=Not, Number of Pins=2, Package Reference=0603, Packaging=TapeandReel, Radiation Hardening=No, REACH SVHC=NoSVHC, RoHSCompliant=true, Termination=SMD/SMT, Voltage Rating (DC)=50V, Width=0.8mm
R10 R11 R12 R13: "Chip Resistor, 0 Ohm, +/- 5%, 0.1 W, -55 to 155 degC, 0603 (1608 Metric), RoHS, Tape and Reel", Case Code (Imperial)=0603, Case Code (Metric)=1608, Manufacturer=Yageo, Max Operating Temperature=155degC, Min Operating Temperature=-55degC, Package Description="2-Pin Surface Mount Device, Body 1.6 x 0.8 mm", Package Quantity=5000, Power Rating=100mW, Resistance=1kΩ, Temperature Coefficient=200ppm/degreesC, Tolerance=5%, Voltage Rating=50V, Case/Package=0603, Composition=ThickFilm, Contact Plating=Tin, Datasheet URL=http://www.yageo.com/NewPortal/yageodocoutput?fileName=/pdf/R-Chip/PYu-RC_Group_51_RoHS_L_5.pdf, Datasheet Version="Rev. 5, 10/2016", Depth=0.8mm, Height=0.45mm, Lead Free=LeadFree, Length=1.6mm, Manufacturer URL=http://www.yageo.com/, Military Standard=Not, Number of Pins=2, Package Reference=0603, Packaging=TapeandReel, Radiation Hardening=No, REACH SVHC=NoSVHC, RoHSCompliant=true, Termination=SMD/SMT, Voltage Rating (DC)=50V, Width=0.8mm
U1: "USB FULL SPEED TO SERIAL UART IC"
U2: "GNSS LCC RX MOD, ROM, CRYSTAL"
U3: "IC REG LINEAR 3.3V 1A SOT223-4"

## Free pads (board coordinates)
  round 5.5 hole 3.4: ""(4,4) ""(4,51) ""(51,4) ""(51,51)

## Via types
v1: diameter 0.45, hole 0.3, TOP to BOTTOM, tented both sides, 170 vias
v2: diameter 0.4, hole 0.3, TOP to BOTTOM, 113 vias
v3: diameter 1.27, hole 0.711, TOP to BOTTOM, tented both sides, 9 vias

## Nets (pads, with @x,y where several pads share a name; then routed paths per layer and width w, separated by ;. In a path a pad name is that pad's centre, name@x,y a point inside that pad or via, vN(x,y) a via of type N, cw(c..) or ccw(c..) an arc to the next point about the centre after c; other vN are vias at no path point)
+5: +5V.1 C2.2 C3.1 C4.1 C10.2 R1.1 U1.12 U3.3 | length 35.7
  TOP w0.5: U1.12 34.342,30.25 34.342,32.731 34.531,32.919 43.087,32.919 v3(43.117,32.889) ; U3.3 U3.3@44.725,40.1 ; C10.2@44.925,42.6 44.925,40.3 U3.3@44.725,40.1 ; C10.2 C4.1 C3.1 ; +5V.1 50,41.5 v3(48.6,40.1) R1.1 U3.3@44.725,40.1
  POWER w0.5: v3(43.117,32.889) 45.546,35.318 46.318,35.318 48.6,37.6 v3(48.6,40.1)
GND: C1.1 C2.1 C3.2 C4.2 C5.2 C6.2 C7.2 C9.1 C10.1 C11.1 D1.1 D2.1 J1.A1 J1.A12 J1.B1 J1.B12 J1.SH1 J1.SH2 J1.SH3 J1.SH4 J3.2 J4.2 J5.2 MP1.1 MP2.1 MP3.1 MP4.1 pad. R4.1 R8.1 U1.5 U1.13 U2.1 U2.10 U2.12 U3.1
  other v1: 7.6,2.7 10.6,2.7 13.6,2.7 16.6,2.7 19.6,2.7 22.6,2.7 25.6,2.7 34.6,2.7 37.6,2.7 40.6,2.7 43.6,2.7 46.6,2.7 9.1,5.7 12.1,5.7 15.1,5.7 18.1,5.7 21.1,5.7 24.1,5.7 39.1,5.7 42.1,5.7 45.1,5.7 48.1,5.7 54.1,5.7 1.6,8.7 4.6,8.7 7.6,8.7 16.6,8.7 40.6,8.7 43.6,8.7 46.6,8.7 49.6,8.7 52.6,8.7 3.1,11.7 6.1,11.7 15.1,11.7 18.1,11.7 24.1,11.7 51.1,11.7 54.1,11.7 1.6,14.7 4.6,14.7 7.6,14.7 10.6,14.7 13.6,14.7 19.6,14.7 22.6,14.7 25.6,14.7 34.6,14.7 3.1,17.7 6.1,17.7 18.1,17.7 30.1,17.7 33.1,17.7 54.1,17.7 1.6,20.7 7.6,20.7 10.6,20.7 16.6,20.7 28.6,20.7 34.6,20.7 46.6,20.7 49.6,20.7 52.6,20.7 6.1,23.7 9.1,23.7 15.1,23.7 18.1,23.7 24.1,23.7 39.1,23.7 42.1,23.7 54.1,23.7 16.6,26.7 19.6,26.7 28.6,26.7 52.6,26.7 12.1,29.7 15.1,29.7 18.1,29.7 27.1,29.7 39.1,29.7 45.1,29.7 51.1,29.7 54.1,29.7 1.6,32.7 4.6,32.7 19.6,32.7 25.6,32.7 28.6,32.7 31.6,32.7 3.1,35.7 12.1,35.7 15.1,35.7 18.1,35.7 21.1,35.7 24.1,35.7 27.1,35.7 30.1,35.7 36.1,35.7 39.1,35.7 42.1,35.7 54.1,35.7 1.6,38.7 4.6,38.7 25.6,38.7 28.6,38.7 31.6,38.7 40.6,38.7 43.6,38.7 49.6,38.7 52.6,38.7 3.1,41.7 6.1,41.7 9.1,41.7 12.1,41.7 18.1,41.7 30.1,41.7 36.1,41.7 39.1,41.7 42.1,41.7 48.1,41.7 51.1,41.7 54.1,41.7 1.6,44.7 4.6,44.7 7.6,44.7 10.6,44.7 13.6,44.7 16.6,44.7 19.6,44.7 22.6,44.7 25.6,44.7 28.6,44.7 31.6,44.7 34.6,44.7 37.6,44.7 40.6,44.7 46.6,44.7 52.6,44.7 3.1,47.7 6.1,47.7 9.1,47.7 12.1,47.7 15.1,47.7 18.1,47.7 21.1,47.7 24.1,47.7 27.1,47.7 30.1,47.7 33.1,47.7 36.1,47.7 39.1,47.7 42.1,47.7 45.1,47.7 48.1,47.7 51.1,47.7 54.1,47.7 7.6,50.7 10.6,50.7 13.6,50.7 16.6,50.7 19.6,50.7 22.6,50.7 25.6,50.7 28.6,50.7 31.6,50.7 34.6,50.7 37.6,50.7 40.6,50.7 43.6,50.7 46.6,50.7
  other v2: 36.12,23.717 36.745,23.907 36.781,24.56 36.781,25.214 36.643,25.853 39.333,26.017 39.987,26.017 41.127,26.017 41.781,26.028 43.608,26.301 40.548,26.32 0.229,26.416 0.813,26.416 1.375,26.417 2.029,26.417 2.683,26.417 3.337,26.417 36.643,26.507 38.992,26.574 3.883,26.776 35.802,26.787 8.392,26.857 9.046,26.857 9.7,26.857 37.138,26.935 38.446,26.935 43.77,26.935 44.424,26.935 45.078,26.935 45.732,26.933 46.386,26.933 7.091,26.96 7.745,26.952 40.542,26.974 4.481,27.043 5.135,27.043 5.789,27.043 6.443,27.043 10.327,27.043 10.981,27.043 49.373,27.192 35.844,27.44 13.633,27.579 40.566,27.627 49.381,27.846 4.536,27.957 5.19,27.957 5.844,27.957 6.498,27.957 10.776,27.957 3.883,28.006 36.858,28.065 37.512,28.065 38.166,28.065 38.82,28.065 44.146,28.065 44.8,28.065 45.454,28.065 46.108,28.063 8.176,28.09 10.131,28.069 35.802,28.093 8.827,28.143 9.481,28.143 46.739,28.236 40.542,28.281 43.608,28.437 6.802,28.536 0.299,28.583 0.953,28.583 1.607,28.583 2.261,28.583 2.915,28.583 3.569,28.58 36.643,28.683 39,28.694 8.193,28.744 35.802,28.747 41.98,28.857 40.24,28.97 39.587,28.983 41.427,29.007 40.792,29.032 7.043,29.144 36.728,29.331 7.957,29.354 7.043,29.798 36.781,29.983 7.957,30.008 7.043,30.452 7.957,30.662 7.043,31.106 7.957,31.316 7.043,31.76 7.957,31.97 7.043,32.414 7.957,32.624 7.043,33.068 7.957,33.278 7.043,33.722 7.957,33.932 7.043,34.376 7.957,34.586 6.966,35.025 8.347,35.111 6.532,35.515 8.722,35.647 6.423,36.16 8.757,36.3 6.672,36.765 8.436,36.87 7.203,37.147 7.865,37.189
GPS_RESET: J5.1 U2.9 | length 24.4
  TOP w0.254: J5.1 10.964,12.964 12,14 16.4,14 19.692,17.292 19.692,20.976 20.623,21.907 20.623,27.843 21.127,28.347 21.127,28.377 21.35,28.6 U2.9
NetC5_1: C5.1 J1.A4 J1.A9 J1.B4 J1.B9 R1.2 | length 19.9
  TOP w0.5: R1.2 47.025,38.525 47.025,37.025 C5.1 47.075,37 48.59,35.485 v3(50.1,35.485)
  POWER w0.5: J1.A4 J1.B9 ; J1.A9 J1.B4 48.725,29.6 50.1,29.6 ; J1.B9@49.02,25.413 50.1,26.494 50.1,29.6 ; v3(50.1,35.485) 50.1,29.6
NetC8_1: C8.1 J3.1 L1.1 | length 7
  TOP w0.228: J3.1 7.46,27.5 L1.1 7.54,27.5 C8.1
NetD1_2: D1.2 R10.1 | length 1.5
  TOP w0.254: R10.1 D1.2
NetD2_2: D2.2 R11.1 | length 1.5
  TOP w0.254: R11.1 D2.2
NetD3_2: D3.2 R12.1 | length 1.5
  TOP w0.254: R12.1 D3.2
NetD4_2: D4.2 R13.1 | length 1.5
  TOP w0.254: R13.1 D4.2
NetJ1_A5: J1.A5 R4.2 | length 4.7
  TOP w0.254: R4.2@44.3,23.2 44.3,24 ; 44.3,24.1 46.425,26.225 J1.A5
NetJ1_B5: J1.B5 R8.2 | length 6.6
  TOP w0.254: J1.B5 49.475,28.775 50.027,29.327 R8.2@50.027,33.902 ; R8.2@50.027,33.802 R8.2@50.325,34.1
NetJ2_2: J2.2 L1.2 | length 7.5
  TOP w0.228: L1.2 J2.2@7.5,36.005
NetR5_2: R5.2 U1.1 | length 2.2
  TOP w0.254: R5.2 31.502,24 31.778,24.275 U1.1
NetR7_2: R7.2 U1.4 | length 7.3
  TOP w0.254: R7.2 30.329,18.925 33.683,22.278 U1.4
RF_IN: C8.2 U2.11 | length 2.8
  TOP w0.228: C8.2 U2.11
RXD: R2.1 R5.1 RXD.1 U2.3 | length 22.6
  TOP w0.254: RXD.1 19,10.9 19,12.3 20.196,13.496 20.196,20.767 21.127,21.698 21.127,21.777 21.35,22 25.05,22 27.075,24.025 R2.1 28.6,24.025 R5.1
RXLED: D4.1 U1.14 | length 22.7
  TOP w0.254: D4.1 20.2,43.5 20.8,44.1 24.5,44.1 33.048,35.552 U1.14
SAFEBOOT_N: J4.1 U2.18 | length 14.4
  TOP w0.254: J4.1 10.631,8.625 8.9,10.355 8.9,17.5 11.2,19.8 U2.18
T_PULSE: R11.2 U2.4 | length 20.1
  TOP w0.254: R11.2 17.775,38.125 23.927,31.973 23.927,27.633 23.1,26.806 23.1,23.75 22.45,23.1 U2.4 U2.4@21.35,23.1
TXD: R7.1 R9.1 TXD.1 U2.2 | length 17.3
  TOP w0.254: TXD.1 20.7,20.25 21.35,20.9 U2.2 25.05,20.9 27.075,18.875 R9.1 28.754,18.875 R7.1
TXLED: D3.1 U1.7 | length 24.8
  TOP w0.254: D3.1 22.557,42.8 27.835,37.522 27.835,32.527 33.463,26.9 34.6,26.9 35.588,25.913 U1.7
USBD2_N: R3.1 U1.9 | length 6.4
  TOP w0.161: U1.9 36.223,27.729 36.307,27.644 39.321,27.644 39.406,27.729 39.406,27.856 R3.1
USBD2_P: R6.1 U1.8 | length 6.4
  TOP w0.161: U1.8 36.223,27.271 36.307,27.356 39.321,27.356 39.406,27.271 39.406,27.144 R6.1
USBD_N: C1.2 J1.A7 J1.B7 R3.2 | length 7.1
  TOP w0.161: R3.2 41.644,27.856 41.644,27.739 41.739,27.644 41.962,27.644 42.311,27.644 42.406,27.739 42.406,27.856 C1.2 43.194,27.856 43.194,27.739 43.289,27.644 45.533,27.644 45.535,27.642 46.986,27.642 47.269,27.925 J1.A7
USBD_P: C6.1 J1.A6 J1.B6 R6.2 | length 7.1
  TOP w0.161: R6.2 41.644,27.144 41.644,27.261 41.739,27.356 42.081,27.356 42.311,27.356 42.406,27.261 42.406,27.144 C6.1 43.194,27.144 43.194,27.261 43.289,27.356 45.414,27.356 45.416,27.354 47.044,27.354 47.323,27.075 J1.A6
VCC: C9.2 C11.2 J2.1 R10.2 U2.7 U2.8 U3.2 U3.4 VCC.1 | length 32.5
  TOP w0.5: J2.1 7.925,38.57 8.37,38.125 R10.2 ; v3(21.3,31.725) 21.3,31.517 21.6,31.217 21.6,30.225 21.825,30 C9.2 ; U2.7 U2.8 22,27.6 23.007,27.6 23.3,27.893 23.3,29.108 22.633,29.775 C9.2@22.1,29.775 ; VCC.1@33.2,43.9 33,43.7 v3(33,39.2) 33.025,39.175 36.075,39.175 C11.2 37.75,39.15 38.5,38.4 U3.4 U3.2
VCCIO: C7.1 R2.2 R9.2 R12.2 R13.2 U1.3 U1.10 U1.11 | length 24.2
  TOP w0.45: R13.2 R12.2 21.813,38.112 23.788,38.112 v3(23.8,38.1) ; R2.2 v3(27.1,27.6) 31.2,27.6 33.048,25.753 U1.3 33.048,23.923 31.525,22.4 C7.1 ; 35.2,30.2 35.588,30.2 U1.10
  TOP w0.5: v3(24.7,17.3) 24.712,17.313 27.087,17.313 R9.2 ; U1.10 35.612,30.25 35.612,31.098 35.841,31.327 36.965,31.327 37.792,30.5 v3(38,30.5)
pads on no net: J1.A8 J1.B8 U1.2 U1.6 U1.15 U1.16 U2.5 U2.6 U2.13 U2.14 U2.15 U2.16 U2.17

## Polygon pours and split planes (outlines as drawn)
VCC on POWER "VCC_L03_P006" (solid, remove dead copper, pour order 6): 0,2.5 0,52.5 cw(c2.5,52.5) 2.5,55 52.5,55 cw(c52.5,52.5) 55,52.5 55,2.5 cw(c52.5,2.5) 52.5,0 2.5,0 cw(c2.5,2.5)
VCCIO on POWER "VCCIO_L03_P002" (solid, pour order 2): 22.7,38.7 23.9,39.9 30.3,39.9 36.6,33.6 39.7,33.6 41.1,32.2 41.1,24.6 31.8,15.3 24.5,15.3 22.7,17.1 22.7,18 22.7,17.1 22.7,18
+5 on POWER "+5_L03_P000" (solid, pour order 0): 43,40.6 44.2,41.8 44.2,46.6 44.9,47.3 55,47.3 55,39.1 47.4,39.1 45.7,39.1 43.5,39.1 43,39.6
GND on GND "GND_L02_P001" (solid, pour order 1): 0,2.5 0,52.5 cw(c2.5,52.5) 2.5,55 52.5,55 cw(c52.5,52.5) 55,52.5 55,2.5 cw(c52.5,2.5) 52.5,0 2.5,0 cw(c2.5,2.5)
GND on TOP "GND_L01_P004" (solid, remove dead copper, pour order 4): 0,2.5 0,52.5 cw(c2.5,52.5) 2.5,55 52.5,55 cw(c52.5,52.5) 55,52.5 55,2.5 cw(c52.5,2.5) 52.5,0 2.5,0 cw(c2.5,2.5)
GND on BOTTOM "GND_L04_P005" (solid, remove dead copper, pour order 5): 0,2.5 0,52.5 cw(c2.5,52.5) 2.5,55 52.5,55 cw(c52.5,52.5) 55,52.5 55,2.5 cw(c52.5,2.5) 52.5,0 2.5,0 cw(c2.5,2.5)

## Keep-outs
POWER:
  rectangle: 0,26.732 3.43,28.25

## Other copper
TOP:
  drawing of 37 lines, arcs and shapes, not listed

## Silkscreen, mask and mechanical layers (free items; w line width, h text height)
Top Overlay:
  text "RF Front End Workshop V2.0" at 19.7,52.567 h1.1
  text "Mainboard" at 38.3,50.9 h1.1
  text "Michael Zheng 2025" at 28.7,49.067 h1.1
Mechanical 1:
  lines w0.254: 0,0 55,0 55,55 0,55 0,0

## Text inside footprints (layer, text, board x,y; h text height)
J1: Mechanical 13 "PCB EDGE" at 54.75,33 h1.02 r90